# Altium PCB roneMotorBoard-v12_PlayWorks.PcbDoc (part 1 of 2)
Units mil, origin at the board's own origin, x right, y up, seen from the top; angles counter-clockwise.
Board outline 3702 x 3936.38 mil, 2 copper layers (Top Layer, Bottom Layer); 102 components, 86 nets, 373 pads, 235 vias.
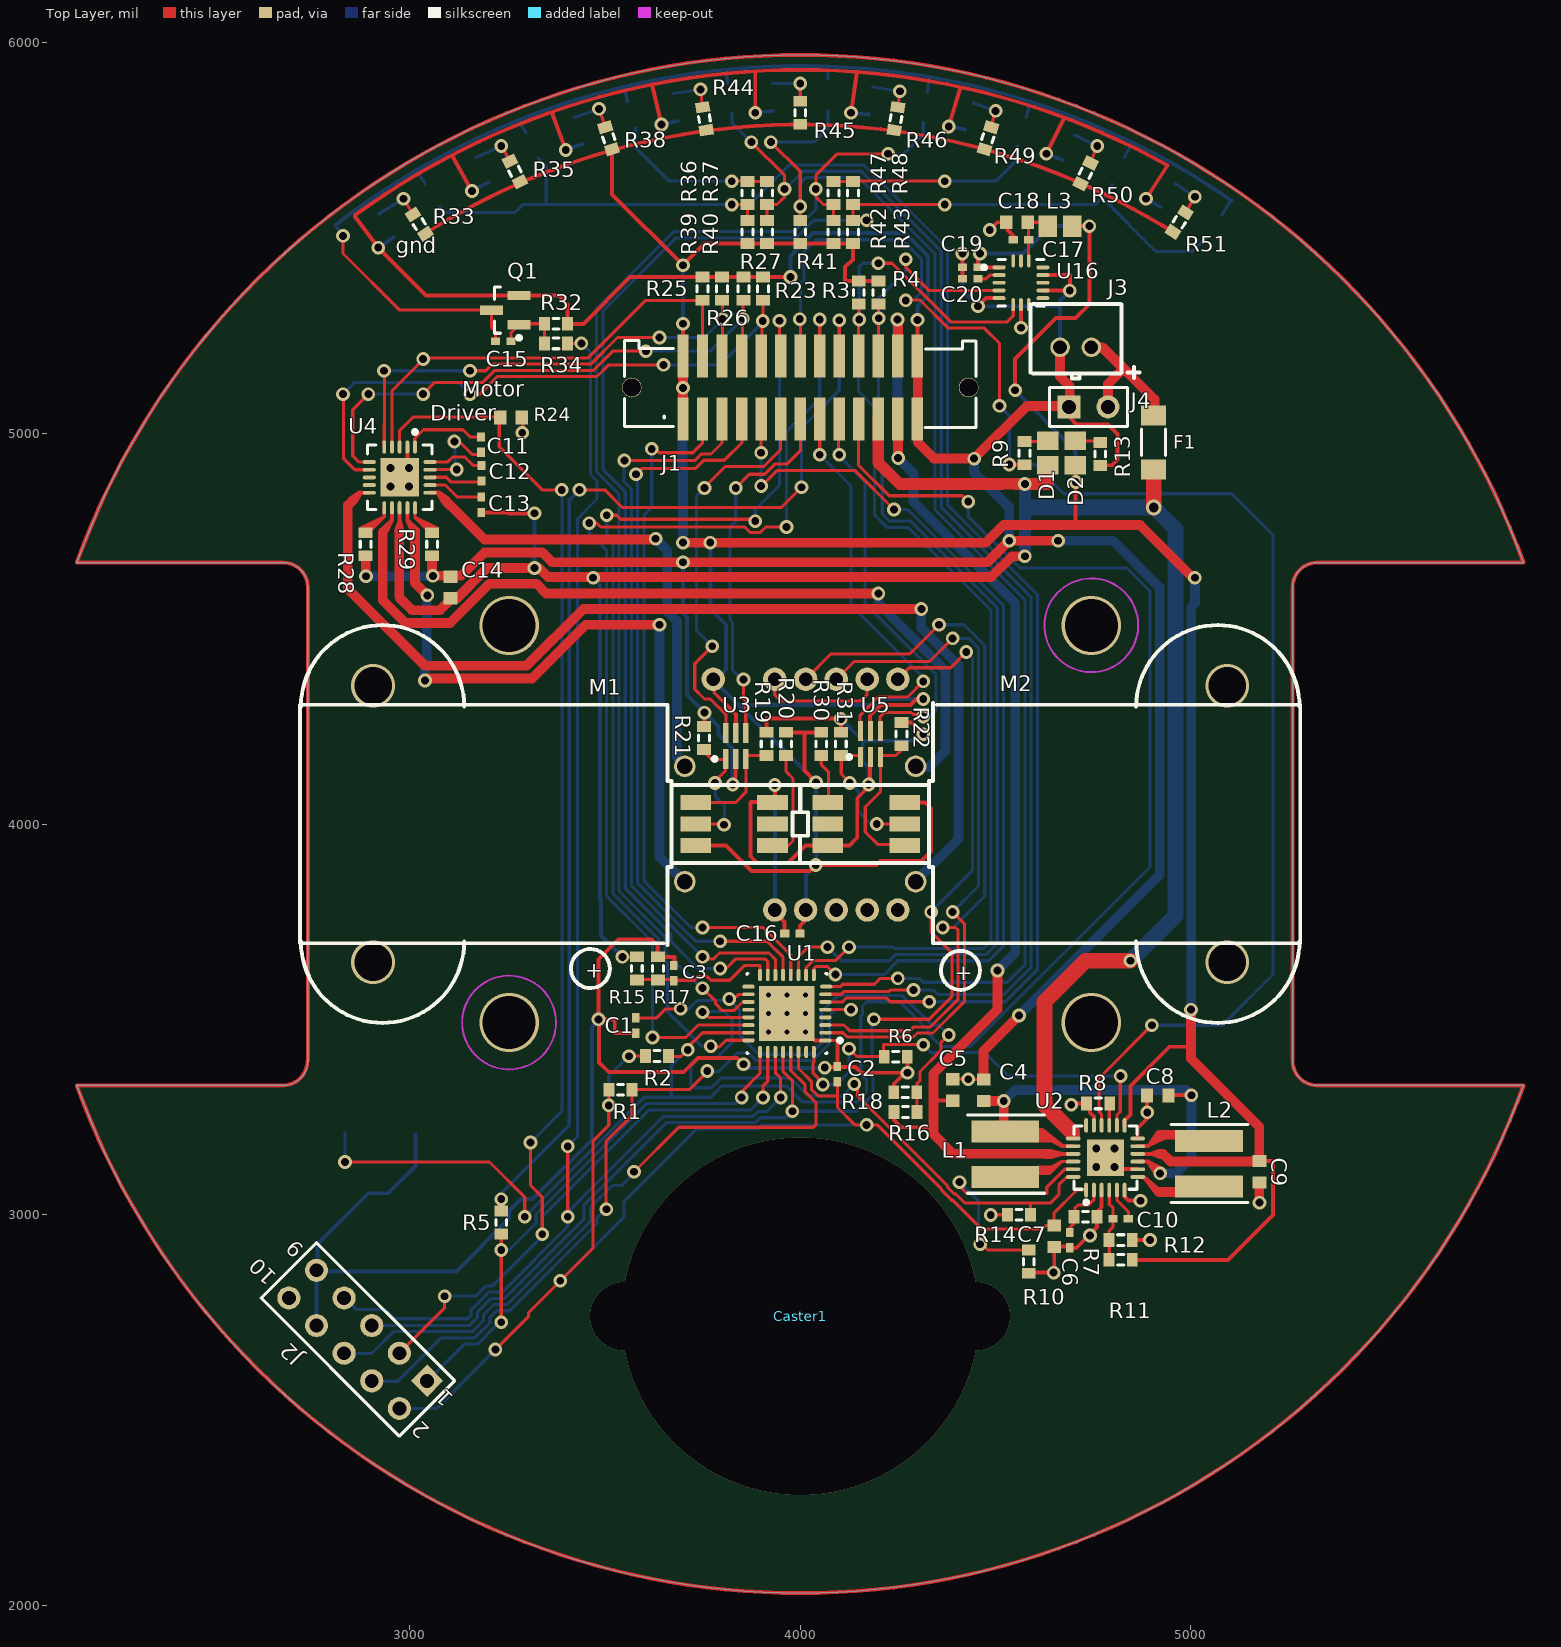
[diagram p0: Top Layer view]
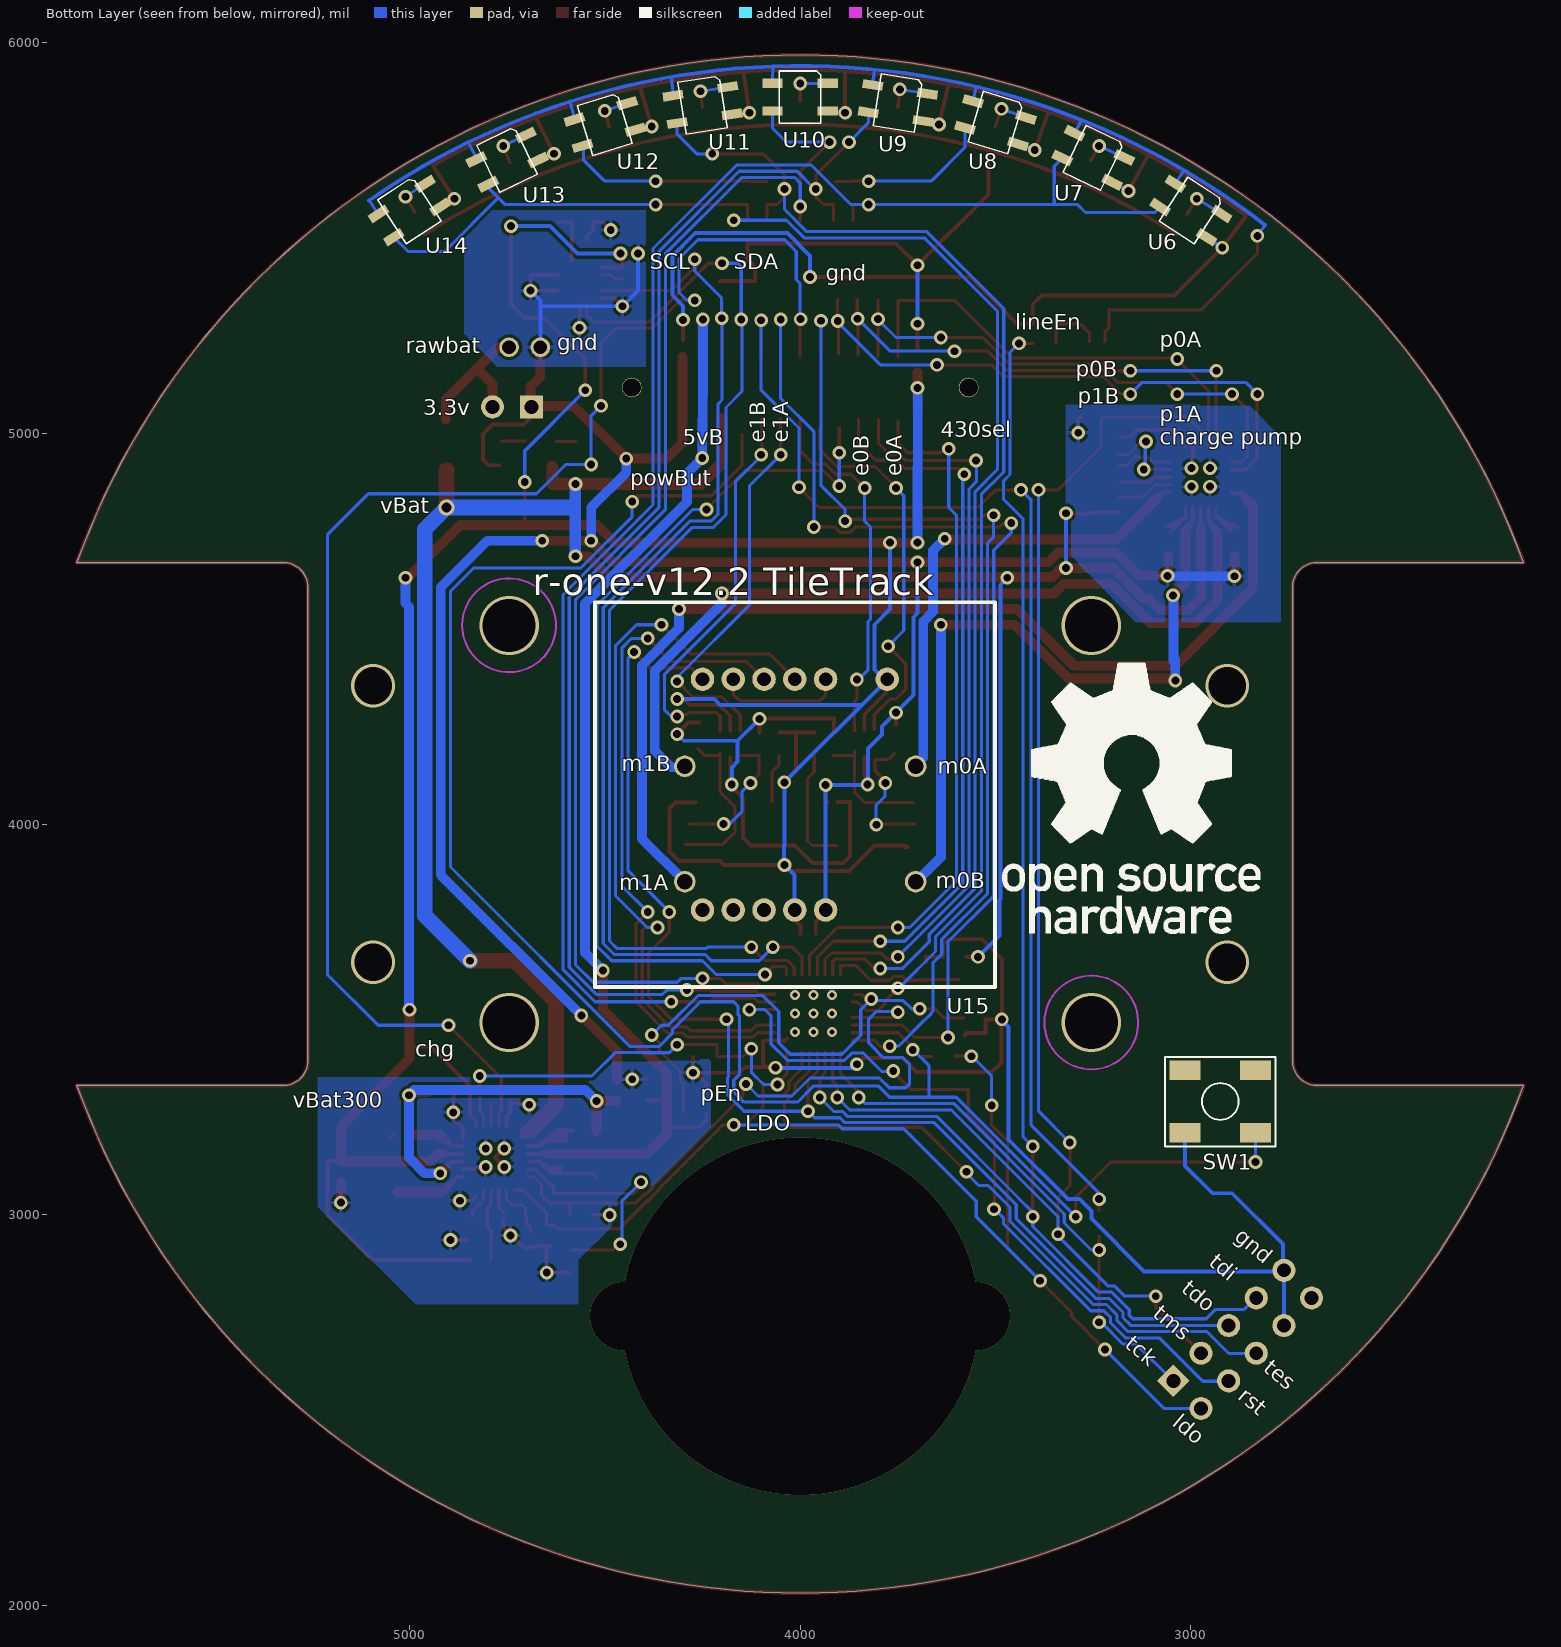
[diagram p1: Bottom Layer view, seen from below]

## Layer stack, top to bottom
Top Layer: signal copper 1.4
Dielectric: dielectric 12.6, FR-4, Dk 4.8
Bottom Layer: signal copper 1.4

## Board outline
2149,3331 2677,3331 ccw(c2677,3394) 2740,3394 2740,4606 ccw(c2677,4606) 2677,4669 2149,4669 cw(c4000,4000) 5851,4669 5323,4669 ccw(c5323,4606) 5260,4606 5260,3394 ccw(c5323,3394) 5323,3331 5851,3331 cw(c4000,4000)

## Design rules (kind name [scope] priority, off if disabled: settings)
Clearance [All] p1: gap=7.9
PolygonConnect [All] p1: connectstyle=Relief reliefconductorwidth=10 reliefentries=4 polygonreliefangle="90 Angle"
RoomDefinition Power [InComponentClass('Power')] p1: confinementstyle=ConfineIn formatcopy=TRUE lockcomponents=FALSE outline 0,0 2000,0 2000,1000 0,1000
RoomDefinition MSP430 [InComponentClass('MSP430')] p2: confinementstyle=ConfineIn formatcopy=TRUE lockcomponents=FALSE outline 0,0 2000,0 2000,1000 0,1000
RoomDefinition motorEncoder [InComponentClass('motorEncoder')] p3: confinementstyle=ConfineIn formatcopy=TRUE lockcomponents=FALSE outline 0,0 2000,0 2000,1000 0,1000
RoomDefinition LineSensors [InComponentClass('LineSensors')] p4: confinementstyle=ConfineIn formatcopy=TRUE lockcomponents=FALSE outline 0,0 2000,0 2000,1000 0,1000
RoutingVias RoutingVias_4 [(IsVia AND InNetClass('All Nets'))] p1: holewidth=20 width=35 viastyle="Through Hole" minholewidth=20 minwidth=35 maxholewidth=20 maxwidth=35
RoutingVias RoutingVias_3 [(IsVia AND InNetClass('All Nets'))] p2: holewidth=20 width=35 viastyle="Through Hole" minholewidth=20 minwidth=35 maxholewidth=20 maxwidth=35
RoutingVias RoutingVias_2 [(IsVia AND InNetClass('All Nets'))] p3: holewidth=20 width=35 viastyle="Through Hole" minholewidth=20 minwidth=35 maxholewidth=20 maxwidth=35
RoutingVias RoutingVias_1 [(IsVia AND InNetClass('All Nets'))] p4: holewidth=20 width=35 viastyle="Through Hole" minholewidth=20 minwidth=35 maxholewidth=20 maxwidth=35
RoutingVias [All] p5: holewidth=20 width=35 viastyle="Through Hole" minholewidth=20 minwidth=35 maxholewidth=20 maxwidth=35
SMDNeckDown [All] p1: percent=50.000
SilkscreenOverComponentPads [All] p1: minsilkscreentomaskgap=10
SolderMaskExpansion [All] p1: expansion=4
Width "Schematic Width Constraint_8" [InNet('3.3V')] p1: maxlimit=100 minlimit=10 preferedwidth=25 minimp=50.000000 maximp=50.000000 favimp=50.000000
Width "Schematic Width Constraint_7" [InNet('VBAT')] p2: maxlimit=50 minlimit=10 preferedwidth=25 minimp=50.000000 maximp=50.000000 favimp=50.000000
Width "Schematic Width Constraint_6" [InNet('VBAT +300')] p3: maxlimit=25 minlimit=10 preferedwidth=25 minimp=50.000000 maximp=50.000000 favimp=50.000000
Width "Schematic Width Constraint_5" [InNet('VBAT_IN')] p4: maxlimit=25 minlimit=10 preferedwidth=25 minimp=50.000000 maximp=50.000000 favimp=50.000000
Width "Schematic Width Constraint_4" [InNet('NetL2_1')] p5: maxlimit=25 minlimit=10 preferedwidth=25 minimp=50.000000 maximp=50.000000 favimp=50.000000
Width "Schematic Width Constraint_3" [InNet('NetL2_2')] p6: maxlimit=25 minlimit=10 preferedwidth=25 minimp=50.000000 maximp=50.000000 favimp=50.000000
Width "Schematic Width Constraint_2" [InNet('5VUSB')] p7: maxlimit=25 minlimit=10 preferedwidth=25 minimp=50.000000 maximp=50.000000 favimp=50.000000
Width "Schematic Width Constraint" [InNet('GND')] p8: maxlimit=25 minlimit=10 preferedwidth=25 minimp=50.000000 maximp=50.000000 favimp=50.000000
Width "Schematic Width Constraint_12" [InNet('MOT_0B')] p9: maxlimit=25 minlimit=10 preferedwidth=20 minimp=50.000000 maximp=50.000000 favimp=50.000000
Width "Schematic Width Constraint_11" [InNet('MOT_0A')] p10: maxlimit=25 minlimit=10 preferedwidth=20 minimp=50.000000 maximp=50.000000 favimp=50.000000
Width "Schematic Width Constraint_10" [InNet('MOT1_B')] p11: maxlimit=25 minlimit=10 preferedwidth=20 minimp=50.000000 maximp=50.000000 favimp=50.000000
Width "Schematic Width Constraint_9" [InNet('MOT1_A')] p12: maxlimit=25 minlimit=10 preferedwidth=20 minimp=50.000000 maximp=50.000000 favimp=50.000000
Width MotorWidth [InNetClass('MotorNets')] p13: maxlimit=25 minlimit=8 preferedwidth=25
Width [All] p14: maxlimit=8 minlimit=8 preferedwidth=8
27 further rules are at their usual default settings.

## Classes and differential pairs
component class GyroAccel: C17 C18 C19 C20 L3 U16
component class Power: C4 C5 C6 C7 C8 C9 C10 D1 D2 F1 J3 J4 L1 L2 R7 R8 R9 R10 R11 R12 R13 R14 R15 R16 R17 R18 U2
component class LineSensors: C15 C16 Q1 R32 R33 R34 R35 R36 R37 R38 R39 R40 R41 R42 R43 R44 R45 R46 R47 R48 R49 R50 R51 U6 U7 U8 U9 U10 U11 U12 U13 U14 U15
component class MSP430: C1 C2 C3 J1 J2 R1 R2 R3 R4 R5 R6 SW1 U1
component class motorEncoder: C11 C12 C13 C14 Caster1 M1 M2 R19 R20 R21 R22 R23 R24 R25 R26 R27 R28 R29 R30 R31 U3 U4 U5

## Components (designator, comment, footprint, x,y, rotation, side; value= is the part's Value field where it differs from the comment)
C1 "Cap Semi" CAPC1005L 3579,3484.5 r90 top
C2 "Cap Semi" CAPC1005L 4095,3360 r270 top
C3 "Cap Semi" CAPC1005L 3676.5,3618.5 r270 top
C4 "Cap" CAPC1608L 4469.5,3318.5 r270 top
C5 "Cap Semi" CAPC1608L 4390.5,3319.5 r270 top
C6 "Cap" CAPC1005L 4690,2935 r90 top
C7 "Cap" CAPC1608L 4650,2945 r270 top
C8 "Cap" CAPC1608L 4915,3305 r180 top
C9 "Cap" CAPC1608L 5175,3110 r90 top
C10 "Cap" CAPC1005L 4820,2990 r0 top
C11 "Cap Semi" CAPC1005L 3183,4971 r90 top
C12 "Cap Semi" CAPC1005L 3184.31,4897.63 r90 top
C13 "Cap Semi" CAPC1005L 3184,4817 r90 top
C14 "Cap Semi" CAPC1608L 3105,4605 r270 top
C15 "Cap" CAPC1005L 3240,5235 r0 top
C16 "Cap Semi" CAPC1005L 3980,3720 r0 top
C17 "Cap Semi" CAPC1005L 4565,5495 r0 top
C18 "Cap Semi" CAPC1608L 4555,5540 r0 top
C19 "Cap Semi" CAPC1005L 4435,5425 r0 top
C20 "Cap Semi" CAPC1005L 4435,5395 r0 top
Caster1 "non connect" "3/4\"CASTER2" 4000,2740 r180 top locked
D1 "Charge" INDC2012L 4634,4949 r90 top
D2 "Power" INDC2012L 4704,4949 r90 top
F1 "PTC" ERJ8G-1206 4904,4976.5 r90 top
J1 "HCOMM/MOT" "HeaderSM 13x2" 4000,5117 r90 top locked
J2 "JTAG" HDR2X5 3045,2575 r135 top locked
J3 "Bat" BatteryConnJST 4705,5220 r180 top
J4 "3.3V conn" HDR1X2 4687.5,5067.5 r0 top
L1 "3.3uH" IndPow 4525,3155 r90 top
L2 "2.2uH" IndPow 5046,3131 r90 top
L3 "Inductor" INDC2012L 4665,5530 r0 top
M1 "motorEncoder_V7b" motorEncoder_V7b 3830,4000 r180 top locked
M2 "motorEncoder_V7b" motorEncoder_V7b 4170,4000 r0 top locked
Q1 "N-Mosfet" SOT-23 3245,5315 r180 top
R1 "Res3" RESC1608L 3540,3320 r180 top
R2 "Res3" RESC1608L 3633.5,3406.5 r180 top
R3 "Res3" RESC1608L 4150,5360 r90 top
R4 "Res3" RESC1608L 4200,5360 r90 top
R5 "Res3" J1-0603 3235,2980 r90 top
R6 "Res3" RESC1608L 4244.5,3404.5 r180 top
R7 "Res3" RESC1608L 4730,2995 r180 top
R8 "Res3" RESC1608L 4762.5,3285 r180 top
R9 "Res3" RESC1608L 4574,4949 r90 top
R10 "Res3" RESC1608L 4585,2880 r90 top
R11 "Res3" RESC1608L 4820,2885 r180 top
R12 "Res3" RESC1608L 4820,2935 r0 top
R13 "Res3" RESC1608L 4768,4947 r90 top
R14 "Res3" RESC1608L 4560,3000 r0 top
R15 "Res3" RESC1608L 3582,3630.5 r90 top
R16 "Res3" RESC1608L 4269.5,3263 r180 top
R17 "Res3" RESC1608L 3636,3630.5 r270 top
R18 "Res3" RESC1608L 4269,3313.5 r0 top
R19 "" RESC1608L 3914,4205 r90 top
R20 "" RESC1608L 3964,4205 r90 top
R21 "" RESC1608L 3754,4220 r270 top
R22 "" RESC1608L 4259,4230 r270 top
R23 "Res3" RESC1608L 3905,5370 r90 top
R24 "Res3" CAPC1608L 3260,5040 r0 top
R25 "Res3" RESC1608L 3750,5370 r90 top
R26 "Res3" RESC1608L 3800,5370 r90 top
R27 "Res3" RESC1608L 3855,5370 r90 top
R28 "Res3" RESC1608L 2888,4716 r270 top
R29 "Res3" RESC1608L 3058,4716 r270 top
R30 "" RESC1608L 4054,4205 r90 top
R31 "" RESC1608L 4104,4205 r270 top
R32 "Res3" J1-0603 3375,5280 r180 top
R33 "Res3" J1-0603 3025,5535 r303 top
R34 "Res3" J1-0603 3375,5230 r0 top
R35 "Res3" J1-0603 3270,5670 r296 top
R36 "Res3" J1-0603 3865,5615 r90 top
R37 "Res3" J1-0603 3915,5615 r90 top
R38 "Res3" J1-0603 3510,5755 r287 top
R39 "Res3" J1-0603 3865,5515 r270 top
R40 "Res3" J1-0603 3915,5515 r270 top
R41 "Res3" J1-0603 4000,5515 r270 top
R42 "Res3" J1-0603 4085,5515 r270 top
R43 "Res3" J1-0603 4135,5515 r270 top
R44 "Res3" J1-0603 3755,5805 r279 top
R45 "Res3" J1-0603 4000,5820 r270 top
R46 "Res3" J1-0603 4245,5805 r261 top
R47 "Res3" J1-0603 4085,5615 r90 top
R48 "Res3" J1-0603 4135,5615 r90 top
R49 "Res3" J1-0603 4480,5755 r253 top
R50 "Res3" J1-0603 4730,5665 r244 top
R51 "Res3" J1-0603 4970,5540 r237 top
SW1 "power button" SwitchTall-TL330 2925,3290 r0 bottom
U1 "MSP430" MSP430_32PIN 3966,3515 r180 top locked
U2 "LTC3566" QFN-24 4781,3146 r90 top
U3 "schmit trigger" DCK(R-PDSO-C6) 3835,4200 r90 top
U4 "MOTOR-A3906" QFN-20 2975,4887 r270 top locked
U5 "schmit trigger" DCK(R-PDSO-C6) 4180,4205 r90 top
U6 "OptoReflector" QRE1113 3000,5570 r33 bottom locked
U7 "OptoReflector" QRE1113 3250,5705 r26 bottom locked
U8 "OptoReflector" QRE1113 3500,5795 r17 bottom locked
U9 "OptoReflector" QRE1113 3750,5845 r9 bottom locked
U10 "OptoReflector" QRE1113 4000,5860 r0 bottom locked
U11 "OptoReflector" QRE1113 4250,5840 r351 bottom locked
U12 "OptoReflector" QRE1113 4500,5790 r343 bottom locked
U13 "OptoReflector" QRE1113 4750,5700 r334 bottom locked
U14 "OptoReflector" QRE1113 5000,5570 r327 bottom locked
U15 "ID-12LA" ID12-LA 4250,3780 r180 bottom locked
U16 "MMA8452Q" MMA8452Q 4565,5385 r0 top

## Footprints (in the part's own frame and the unit in brackets; to place one, negate y for a bottom-side part, rotate by r counter-clockwise, add the part's x,y. Pads: shape width x height; smd on the part's side, far side on the other; paste and mask are expansions set on the pad)
"3/4\"CASTER2" [mil] "3/4\" caster for board"
BatteryConnJST [mil] "Connector for Battery"
  round 50 hole 35: 1(-40,0) 2(40,0)
  silkscreen extent -163,-110 116,80
CAPC1005L [mm] "Chip Capacitor, Body 1.0x0.5mm, IPC High Density"
  rect 0.6x0.5 smd: 1(-0.5,0) 2(0.5,0)
  body extent -0.55,-0.3 0.55,0.3, height 1.3
CAPC1608L [mm] "Chip Capacitor, Body 1.6x0.8mm, IPC High Density"
  rect 0.8x0.9 smd: 1(-0.7,0) 2(0.7,0)
  body extent -0.87,-0.48 0.87,0.48, height 1.3
DCK(R-PDSO-C6) [mm] "TSOP, 6-Leads, Body 2.2x1.4mm (max), Pitch 0.65mm, IPC Medium Density"
  rect 1.3x0.35 smd: 1(-0.85,0.65) 2(-0.85,0) 3(-0.85,-0.65) 4(0.85,-0.65) 5(0.85,0) 6(0.85,0.65)
  silkscreen extent -0.97,1.25 -0.73,1.5, body extent -0.7,-1.07 0.7,1.08, height 1.1
ERJ8G-1206 [mm] "Chip Resistor, Body 3.2x1.6mm, IPC High Density"
  rect 1.3x1.6 smd: 1(-1.75,0) 2(1.75,0)
  silkscreen extent -0.86,-0.79 0.86,0.79, body extent -1.6,-0.79 1.6,0.79, height 0.9
HDR1X2 [mm] "Connector; Header; 2 Position"
  rect 1.5x1.5 hole 0.9: 1(0,0)
  round 1.5 hole 0.9: 2(2.54,0)
  silkscreen extent -1.27,-1.27 3.81,1.27
HDR2X5 [mm] "Connector; Header; 5x2 Position"
  rect 1.5x1.5 hole 0.9: 1(0,0)
  round 1.5 hole 0.9: 2(0,2.54) 3(2.54,0) 4(2.54,2.54) 5(5.08,0) 6(5.08,2.54) 7(7.62,0) 8(7.62,2.54) 9(10.16,0) 10(10.16,2.54)
  silkscreen extent -1.27,-1.27 11.43,3.81
"HeaderSM 13x2" [mm]
  rect 2.795x0.74 smd: 1(-2.032,7.62) 2(2.033,7.62) 3(-2.032,6.35) 4(2.033,6.35) 5(-2.032,5.08) 6(2.033,5.08) 7(-2.032,3.81) 8(2.033,3.81) 9(-2.032,2.54) 10(2.033,2.54) 11(-2.032,1.27) 12(2.033,1.27) 13(-2.032,0) 14(2.033,0) 15(-2.032,-1.27) 16(2.033,-1.27) 17(-2.032,-2.54) 18(2.033,-2.54) 19(-2.032,-3.81) 20(2.033,-3.81) 21(-2.032,-5.08) 22(2.033,-5.08) 23(-2.032,-6.35) 24(2.033,-6.35) 25(-2.032,-7.62) 26(2.033,-7.62)
  round 1.27 hole 1.19: c1(0,10.947) c2(0,-10.947)
  silkscreen extent -2.59,-11.43 3.06,11.43
ID12-LA [mil]
  round 60 hole 35: 1(314.96,0) 2(236.22,0) 3(157.48,0) 4(78.74,0) 5(0,0) 6(0,590.55) 7(78.74,590.55) 8(157.48,590.55) 9(236.22,590.55) 10(314.96,590.55) 11(472.44,590.55)
  silkscreen extent -276,-197 748,787
INDC2012L [mm] "Chip Inductor, Body 2.0x1.2mm, IPC High Density"
  rect 1.2x1.4 smd: 1(-0.8,0) 2(0.8,0)
  body extent -1.1,-0.7 1.1,0.7, height 0.55
IndPow [mil]
  rect 56.5x173 smd: 1(-58.25,0) 2(58.25,0)
  silkscreen extent -100,-100 100,97
J1-0603 [mm] "Chip Resistor, Body 1.6x0.8mm, IPC High Density"
  rect 0.7x0.9 smd: 1(-0.75,0) 2(0.75,0)
  silkscreen extent -0.2,-0.35 0.2,0.35, body extent -0.85,-0.48 0.85,0.48, height 0.9
MMA8452Q [mm] "accelerometer-v9"
  oval 0.85x0.25 smd: 1(-1.425,1) 2(-1.425,0.5) 3(-1.425,0) 4(-1.425,-0.5) 5(-1.425,-1) 9(1.425,-1) 10(1.425,-0.5) 11(1.425,0) 12(1.425,0.5) 13(1.425,1)
  oval 0.25x0.85 smd: 6(-0.5,-1.425) 7(0,-1.425) 8(0.5,-1.425) 14(0.5,1.425) 15(0,1.425) 16(-0.5,1.425)
  silkscreen extent -2.52,-1.52 1.5,1.53, body extent -1.5,-1.5 1.5,1.5, height 1
motorEncoder_V7b [mm] "Precision Wire Wound Inductor, 2-Leads, Body 2.5x2.3mm, IPC Medium Density"
  rect 2x1 smd: A(-2.524,1.4) C(2.476,1.4) E1(2.476,0) E2(2.476,-1.4) K(-2.524,-1.4) NC(-2.524,0)
  round 1.4 hole 1: M1(3.185,3.75) M2(3.185,-3.75)
  Mechanical 1 keep-out region: 4.496,-7.849 28.118,-7.849 28.118,7.645 4.496,7.645
  silkscreen extent -4.83,-12.93 28.18,12.93
MSP430_32PIN [mm] "32 pin QFN"
  oval 0.8x0.25 smd: 1(-2.5,1.75) 2(-2.5,1.25) 3(-2.5,0.75) 4(-2.5,0.25) 5(-2.5,-0.25) 6(-2.5,-0.75) 7(-2.5,-1.25) 8(-2.553,-1.75) 17(2.5,-1.75) 18(2.5,-1.25) 19(2.5,-0.75) 20(2.5,-0.25) 21(2.5,0.25) 22(2.5,0.75) 23(2.5,1.25) 24(2.5,1.75)
  oval 0.25x0.8 smd: 9(-1.75,-2.5) 10(-1.25,-2.5) 11(-0.75,-2.5) 12(-0.25,-2.5) 13(0.25,-2.5) 14(0.75,-2.5) 15(1.25,-2.5) 16(1.75,-2.5) 25(1.75,2.5) 26(1.25,2.5) 27(0.75,2.5) 28(0.25,2.5) 29(-0.25,2.5) 30(-0.75,2.5) 31(-1.25,2.5) 32(-1.75,2.5)
  rect 3.6x3.6 smd: 33(0,0)
  silkscreen extent -3.58,-2.6 2.6,2.6, body extent -2.58,-2.57 2.57,2.58, height 1
QFN-20 [mm] "QFN, 20-Leads, Body 4.2x4.2mm (max), Pitch 0.50mm, IPC Medium Density"
  oval 0.85x0.25 smd: 1(-1.975,1) 2(-1.975,0.5) 3(-1.975,0) 4(-1.975,-0.5) 5(-1.975,-1) 11(1.975,-1) 12(1.975,-0.5) 13(1.975,0) 14(1.975,0.5) 15(1.975,1)
  oval 0.25x0.85 smd: 6(-1,-1.975) 7(-0.5,-1.975) 8(0,-1.975) 9(0.5,-1.975) 10(1,-1.975) 16(1,1.975) 17(0.5,1.975) 18(0,1.975) 19(-0.5,1.975) 20(-1,1.975)
  rect 2.5x2.5 smd: 21(0,0)
  silkscreen extent -3.07,-2.1 2.1,2.1, body extent -2.07,-2.07 2.07,2.07, height 0.8
QFN-24 [mm] "QFN, 24-Leads, Body 4.1x4.1mm (max), Pitch 0.50mm, IPC Medium Density"
  oval 0.95x0.25 smd: 1(-2.1,1.25) 2(-2.1,0.75) 3(-2.1,0.25) 4(-2.1,-0.25) 5(-2.1,-0.75) 6(-2.1,-1.25) 13(2.1,-1.25) 14(2.1,-0.75) 15(2.1,-0.25) 16(2.1,0.25) 17(2.1,0.75) 18(2.1,1.25)
  oval 0.25x0.95 smd: 7(-1.25,-2.1) 8(-0.75,-2.1) 9(-0.25,-2.1) 10(0.25,-2.1) 11(0.75,-2.1) 12(1.25,-2.1) 19(1.25,2.1) 20(0.75,2.1) 21(0.25,2.1) 22(-0.25,2.1) 23(-0.75,2.1) 24(-1.25,2.1)
  rect 2.4x2.4 smd: 25(0,0)
  silkscreen extent -3.02,-2.05 2.05,2.05, body extent -2.05,-2.05 2.05,2.05, height 0.8
QRE1113 [mil] "Reflective Opto Sensor with Analog Output"
  rect 52x24 smd: 1(-70.87,-35.43) 2(70.87,-35.43) 3(70.87,35.43) 4(-70.87,35.43)
  silkscreen extent -53,-67 53,67, body extent -57,-72 57,71, height 67
RESC1608L [mm] "Chip Resistor, Body 1.6x0.8mm, IPC High Density"
  rect 0.7x0.9 smd: 1(-0.75,0) 2(0.75,0)
  silkscreen extent -0.2,-0.35 0.2,0.35, body extent -0.85,-0.48 0.85,0.48, height 0.9
SOT-23 [mm] "SOT23, 3-Leads, Body 3.0x2.5mm (max), Pitch 0.95mm, IPC Medium Density"
  rect 1.5x0.6 smd: 1(-0.9,0.95) 2(-0.9,-0.95) 3(0.9,0)
  silkscreen extent -1.03,-1.5 0.7,1.92, body extent -0.7,-1.5 0.7,1.5, height 1.2
SwitchTall-TL330 [mil] "Small SMDTall Tact Switch E-Switch TL330"
  rect 80x50 smd: 1(-90,80) 2(90,80) 3(-90,-80) 4(90,-80)
  silkscreen extent -141,-114 141,115

## Part data
C1 C2 C3 C5 C11 C12 C13 C14 C16 C17 C18 C19 C20: "Capacitor (Semiconductor SIM Model)"
C4 C6 C7 C8 C9 C10 C15: "Capacitor"
Caster1: library part "Caster 3/4in", "This is just a space saver to get the caster onto the pcb"
D1 D2: library part LED2, "Typical RED, GREEN, YELLOW, AMBER GaAs LED"
F1: library part PTC_FUSE, "Fuse"
J1: library part HCOMM/HMOT, "Header, 2X20, 50mil, IDC"
J2: library part "Header 5X2", "Header, 5-Pin, Dual row"
J3: library part BatteryConnJST
J4: library part "Header 2", "Header, 2-Pin"
L1 L2: library part Inductor
R1 R2 R3 R4 R5 R6 R7 R8 R9 R10 R11 R12 R13 R14 R15 R16 R17 R18 R23 R24 R25 R26 R27 R28 R29 R32 R33 R34 R35 R36 R37 R38 R39 R40 R41 R42 R43 R44 R45 R46 R47 R48 R49 R50 R51: "Resistor"
R19 R20 R21 R22 R30 R31: library part Res3, "Resistor"
SW1: library part Switch-TL330
U1: library part MSP430_32pin
U6 U7 U8 U9 U10 U11 U12 U13 U14: library part QRE1113GR

## Via types
v1: diameter 35, hole 20, Top Layer to Bottom Layer, 109 vias
v2: diameter 35, hole 20, Top Layer to Bottom Layer, tented bottom, 97 vias
v3: diameter 25.98, hole 12.99, Top Layer to Bottom Layer, tented both sides, 9 vias
v4: diameter 35, hole 20, Top Layer to Bottom Layer, tented both sides, 8 vias
v5: diameter 112, hole 96, Top Layer to Bottom Layer, tented bottom, 4 vias
v6: diameter 152, hole 136, Top Layer to Bottom Layer, tented bottom, 4 vias
v7: diameter 175, hole 175, Top Layer to Bottom Layer, tented bottom, 2 vias
v8: diameter 915, hole 915, Top Layer to Bottom Layer, tented bottom, 1 vias
v9: diameter 40, hole 25, Top Layer to Bottom Layer, tented bottom, 1 vias

## Nets (pads, with @x,y where several pads share a name; then routed paths per layer and width w, separated by ;. In a path a pad name is that pad's centre, name@x,y a point inside that pad or via, vN(x,y) a via of type N, cw(c..) or ccw(c..) an arc to the next point about the centre after c; other vN are vias at no path point)
3.3LDO: C2.2 C7.1 J2.2 R1.2 R2.2 U1.30 U2.1 | length 3297.4
  Top Layer w8: v2@3223.75,2658.75 3305,2740 3305,2750 3470,2915 3470,3189 3510,3229 v2(3510,3280) ; v2@3510.47,3280.47 R1.2@3510.47,3320 ; v2@3569,3406 R2.2@3604.5,3406 ; U1.30@3995.53,3416.57 3995.53,3374.47 4028.6,3341.4 4028.6,3321.32 4045.82,3304.1 4092.9,3304.1 4093.5,3303.5 ; 4095.5,3315.5 4095.5,3274.5 4140,3230 4197.5,3230 4361.2,3066.3 ; 4095.5,3316 C2.2@4095.5,3339 ; 4361.2,3063.74 4387.74,3037.2 ; 4390.3,3037.2 4463.5,2964 4620,2964 4629,2973 4649,2973 4649,3004 4708.48,3063.48 U2.1@4731.79,3063.48
  Bottom Layer w8: J2.2@2977.5,2504.5 3069.5,2504.5 3209.5,2644.5 v2@3209.5,2660 ; v2@3397.25,2835.75 3397.25,2842.25 3549.5,2994.5 3549.5,3034.5 3735,3220 3892.46,3220 3902.46,3230 v2(4170,3230) ; v2(3510,3280) 3510,3355 3560.5,3405.5 v2(3562,3405.5)
  other v2: 3220,2655 3386,2831
3.3V: C9.2 C16.2 C19.2 D2.1 J1.1 J1.2 L3.2 M1.C M2.C R3.2 R4.2 R11.1 R20.2 R30.2 R33.2 R35.2 R38.2 R39.2 R40.2 R41.2 R42.2 R43.2 R44.2 R45.2 R46.2 R49.2 R50.2 R51.2 U2.10 U2.13 U3.5 U5.5 U15.2 U15.11 U16.1 | length 12376.2
  Top Layer w10: R33.2@3038.34,5509.74 cw(c4000,4000) R38.2@3518.63,5724.06 ; R38.2@3518.63,5723.63 3518.63,5611.37 v1(3700,5430) 3755.47,5485.47 R39.2@3865,5485.47 ; R38.2@3518.63,5726.76 R38.2@3518.63,5724.06 ; J1.2@3700,5215 v1(3700,5280) ; M1.C@3723.62,3940.88 M1.C@3732.56,3940.88 ; M1.C@3732.52,3944.88 3810.12,3944.88 3875,3880 4025,3880 v1(4040,3895) 4195,3895 4205,3905 4310,3905 4335,3930 4335,4040 4319.88,4055.12 M2.C@4267.48,4055.12 ; U15.11@3780,4365 3780,4335.87 3836,4279.87 U3.5@3836,4241.46 ; R39.2@3865.47,5485.47 R40.2@3915,5485.47 R41.2@4000,5485.47 R42.2@4085,5485.47 R43.2@4135,5485.47 ; R20.2@3964,4234.53 4010.5,4234.53 ; C16.2@3999.69,3720 3999.69,3739.69 4010,3750 U15.2@4010,3780 ; v2(4040.5,4106.5) 4010.5,4136.5 4010.5,4234.53 ; R30.2@4052.53,4234.53 4010.5,4234.53 ; R43.2@4135,5485 4135,5445 4115,5425 4115,5390 R4.2@4205,5390 ; U5.5@4179,4238.46 4179,4277.1 4206.9,4305 4282.32,4305 4297.32,4320 4301.2,4320 v1@4313.1,4308.1 ; C19.2@4454.69,5425 4454.69,5454.69 v1(4460,5460) ; C19.2@4455,5424.37 U16.1@4508.9,5424.37 ; v1(4550,5110) 4550,5190 4655,5295 4705,5295 4740,5330 v1(4740,5530) L3.2@4700,5530 ; 4705,4770 v2(4705,4875) ; 4705,4855 D2.1@4705,4902 ; 4740,5630 4740,5629.88 ; U2.13@4830.21,3228.68 4830.21,3241.71 4845,3256.5 4845,3330 4945,3430 5000,3430 ; R11.1@4846.5,2884 5095,2884 5210,2999 5210,3135.33 ; U2.10@4863.68,3156 4921,3156 ; R51.2@4961.96,5509.54 ccw(c4000,4000) 4740,5629.88 ; C9.2@5175,3137.56 5207.77,3137.56 ; R38.2@3518.63,5724.06 cw(c4000,4000) 4740,5629.88
  Top Layer w25: v2(3700,4720) v2(3770,4720) 4475,4720 4520,4765 4870,4765 v1@5000,4635 ; J1.1@3700,5055 v2(3700,5116) J1.2@3700,5156 ; 4921,3156 4928.28,3156 4948.28,3136 C9.2@5175,3136 ; v1(5000,3525) 5000,3430 5000,3400 5174.5,3225.5 C9.2@5174.5,3138.06
  Bottom Layer w10: v1(3700,5280) v1@3700,5425 ; v2(3770,4720) 3770,4550 3810,4510 3810,4395 U15.11@3775,4360 ; U15.11@3787,4360 4040,4107 4040,3946 ; 3845,4305 4205,4305 4220,4320 v1(4315,4320) ; U15.2@4015,3780 4015,3870 v1(4040,3895) 4041,3896 4041,3945 ; v1(4460,5460) 4570,5460 4640,5530 v1(4740,5530) ; v1(4550,5110) 4705,4955 v2(4705,4875) v2@4705,4861.9
  Bottom Layer w25: v2@3699,5115 v2(3700,4720) ; v1(5000,3525) 5000.8,3525.8 5000.8,4555.8 5010,4565 v1(5010,4630)
5VUSB: C5.2 J1.23 J1.24 R16.2 U2.21 | length 3046.2
  Top Layer w10: R16.2@4240,3257.5 4240,3242.5 4258.5,3224 4341,3224 ; 4344,3292 C5.2@4392.69,3292 ; 4641,3156 U2.21@4698.32,3156
  Top Layer w25: J1.24@4250,5184 J1.24@4250,5197.02 v2@4250,5289 ; v2(4250.5,4936.5) J1.23@4250.5,5032.5 ; v1(4505,3625) 4505,3525 4341,3361 4341,3224 4341,3206.5 4391.5,3156 4641,3156
  Bottom Layer w25: v2@4249,5290 4249,5146 v2(4250.5,4936.5) 4290,4897 4290,4824.51 4550.6,4563.91 4550.6,3670.6 v1(4505,3625)
  other v2: 4249,5291
5VUSB_SENSE: C1.2 R16.1 R18.2 U1.18 | length 1328.5
  Top Layer w8: C1.2@3581,3504 3632.5,3504 3655.5,3527 v2(3694,3527) ; v2(3818.26,3552) 3830,3552 3841.5,3563.5 U1.18@3859,3563.5 ; R18.2@4298.53,3313.5 4298.53,3335.03 4306.5,3343 4306.5,3366.5 4360,3420 4360,3440 v2(4380,3460) ; R16.1@4299.03,3263 R18.2@4299.03,3309.97
  Bottom Layer w8: v2(3694,3527) 3715,3527 3735.9,3547.9 3811.4,3547.9 v2@3811.5,3548 ; v2@3820,3550 3845,3525 3845,3459.06 3893.16,3410.9 4025.9,3410.9 4055,3440 4055,3520 4095.9,3560.9 4261.59,3560.9 4337.49,3485 4355,3485 v2(4380,3460)
CHARGE_LIMIT_LIM1: R6.2 U1.32 U2.14 | length 1124.3
  Top Layer w8: U1.32@4034.9,3416.57 4034.9,3390.4 4033.1,3388.6 4033.1,3361.9 4055.5,3339.5 v2@4058,3339.5 ; v2(4125,3425) 4145,3405 4213,3405 R6.2@4213,3406.47 ; R6.2@4213,3410 4213,3435.5 v2@4313,3435.5 ; U2.14@4810.53,3228.68 4810.53,3255.38 ; 4810.74,3255.38 4819,3263.65 v2@4819,3356
  Bottom Layer w8: v2(4058,3333.5) 4094,3333.5 4125,3364.5 v2(4125,3425) ; v2(4315,3435) 4314.5,3435 4314,3434.5 4315.5,3434.5 4335.3,3414.7 4398.76,3414.7 4399.06,3415 4473,3415 4533,3355 v2(4820,3355)
CHRG: J1.14 R9.1 U2.16 | length 3930.6
  Top Layer w8: J1.14@4001,5198.02 v2@4001,5291 ; v1@4270,5341 4306.51,5341 4378.41,5269.1 4470.9,5269.1 4510,5230 v1(4510,5070) ; v2@4532.53,4919.47 R9.1@4564,4919.47 ; U2.16@4771.16,3228.68 4771.16,3257.34 4765,3263.5 4765,3350 v1(4900,3485)
  Bottom Layer w8: v2@4001,5294 4001,5384.42 4010,5393.42 4010,5465 4040,5495 4261.58,5495 4310,5446.58 4310,5360 4291,5341 v1@4270,5341 ; v1(4510,5070) 4535,5045 v2(4535,4920) 4600,4920 4675,4845 5105,4845 5210,4740 5210,3615 5080,3485 v1(4900,3485) v1@4895,3485
  other v1: 4270,5340
  other v2: 3999,5292
FTDI_RESET: J1.12 U1.24 | length 2595.1
  Top Layer w8: v1(3505,4790) 3530,4790 3540,4780 3880,4780 v1(3885,4775) ; v2@3774.5,3430 3793.5,3430 3810,3446.5 U1.24@3867.18,3446.5 ; J1.12@3947,5199 v2(3947,5288)
  Bottom Layer w8: v1(3505,4790) 3505,4735 3520.5,4719.5 3520.5,3822.07 3637.9,3704.67 3637.9,3667.13 3660,3645.03 3660,3520 3664.6,3515.4 3664.6,3514.82 3681.82,3497.6 3682.4,3497.6 3748.5,3431.5 v2@3770.5,3431.5 ; v1(3885,4775) 3885,4805 3947,4867 v2(3947,5288)
  other v2: 3771,3431.5
GND: C1.1 C2.1 C3.1 C4.1 C5.1 C6.1 C7.2 C8.2 C9.1 C14.1 C16.1 C17.1 C18.1 C19.1 C20.1 J1.25 J1.26 J2.8 J2.9 J3.2 J4.1 M1.K M2.K Q1.2 R6.1 R7.1 R8.2 R10.1 R12.2 R13.1 R14.1 R17.1 R18.1 R19.2 R21.1 R22.1 R23.2 R24.2 R25.2 R26.2 R27.2 R28.2 R29.2 R31.1 R32.1 SW1.2 U1.1 U1.33 U2.3 U2.6 U2.8 U2.12 U2.17 U2.25 U3.2 U4.2 U4.21 U5.2 U6.4 U7.4 U8.4 U9.4 U10.4 U11.4 U12.4 U13.4 U14.4 U15.1 U16.5 U16.7 U16.10 U16.12 | length 18609.6
  Top Layer w8: U1.1@4067.94,3446 4095,3446 ; C5.1@4390,3347.56 v2@4427.5,3347.56 ; v2@4429.94,3346.06 C4.1@4469,3346.06
  Top Layer w10: 2860,5555 v1(2920,5475) ; 2860.21,5557.49 cw(c4000,4000) 3620.63,5892.35 ; v1@2921.84,5472.48 cw(c4000,4000) 2922.23,5472.77 3042.6,5352.4 Q1.2@3280.43,5352.4 3382.6,5352.4 3405,5330 3405,5280 3445,5280 3564.53,5399.53 R25.2@3750,5399.53 ; U4.21@2995,4907 U4.2@2995,4965.07 ; 3110,5710 v1(3160,5620) ; R24.2@3282.56,5042 3290,5034.56 3290,5002.5 v2(3288.5,5001) ; 3365,5820 v1(3400,5725) ; v2(3484,3500) 3484,3654 3535,3705 3620,3705 3635,3690 R17.1@3635,3660 ; v2@3485,3500 3485,3390 3510,3365 3702,3365 3738,3401 3839,3401 v2(3855,3385) ; v2@3485.5,3500 3525.47,3500 3525.47,3465.5 3572.82,3465.5 C1.1@3579.5,3458.82 ; v1(3645,5790) 3620.63,5892.35 ; R17.1@3645.5,3661.5 3647,3660 3678,3660 C3.1@3678,3647.18 ; R25.2@3751,5399.53 R26.2@3800,5399.53 R27.2@3855,5399.53 R23.2@3905,5399.53 v2@3980,5399.53 ; R21.1@3755,4254 v2(3755,4285) ; v2@3830,4102.5 3835,4126 U3.2@3835,4166.54 U3.2@3835,4171.54 ; 3872.5,4055 3872.5,3917.5 3890,3900 3969,3900 4014,3945 M2.K@4096,3945 ; 3873.5,4056 M1.K@3904.12,4056 ; v1(3885,5820) 3885,5925 ; R19.2@3914,4235 3914,4270 v1@4096,4270 ; M1.K@3929.37,4055.12 3930.12,4055.12 3935,4060 v1(3935,4100) ; U15.1@3932.52,3777.48 3960.32,3749.68 C16.1@3960.32,3720 ; U1.33@4033.12,3450.88 4037.9,3446.1 U1.1@4064.43,3446.1 ; v2@4058,3378 C2.1@4095,3378 ; M2.K@4094.84,3944.88 4125.88,3944.88 4146,3965 4146,4066 v2@4176.5,4096.5 ; C2.1@4095,3379.68 4095,3444.5 ; C2.1@4096.69,3378 4141,3378 4155.5,3363.5 v2@4262.2,3363.5 ; R31.1@4104,4234.53 v1@4104,4262 ; v1(4130,5820) 4144.94,5924.55 ; 4145,5925 4144.94,5924.55 ; v2@4179,4101 U5.2@4179,4171.54 ; R18.1@4239.47,3313.5 4239.47,3334.97 4274.5,3370 R6.1@4274.5,3404 ; R22.1@4259,4259.53 4285.47,4259.53 v2(4315,4230) ; J1.26@4300,5239 v2(4300,5290) ; v1(4380,5785) 4410,5885 ; C19.1@4415,5425 v1(4415,5460) ; C20.1@4415.31,5395 C19.1@4415.31,5424.69 ; v1(4455,5325) 4475.63,5345.63 U16.5@4508.9,5345.63 ; v1@4477.5,5512.5 v1(4485,5520) 4505,5540 C18.1@4527.44,5540 ; v2@4496.5,3000 R14.1@4530.47,3000 ; C18.1@4530,5540 4530,5520 4545.31,5504.69 C17.1@4545.31,5495 ; v1(4565,5270) U16.7@4565,5328.9 ; R10.1@4592,2852 v2(4648.5,2852) ; U16.10@4621.1,5365.31 v1@4690,5365.31 ; U16.12@4621.1,5404.69 4690,5404.69 v1@4690,5365.31 ; v1(4630,5715) 4675,5805 ; C7.2@4640,2918.44 C6.1@4690,2918.44 ; v2@4650,2853.5 C7.2@4650,2917.44 ; C6.1@4690,2915.32 4706.31,2915.32 4760,2969 R7.1@4760,2988 ; J4.1@4690,5060 4690,5040 4707.5,5022.5 4787,5022.5 ; v1(4690,5365) v1@4690,5365.31 ; v2@4696,3284.5 R8.2@4740.47,3284.5 ; R8.2@4741,3292 4741,3262 4751.47,3251.53 U2.17@4751.47,3228.68 ; U2.25@4751.47,3175.69 4781,3146.16 U2.25@4771.16,3136.32 ; R7.1@4759,3007 4771.16,3019.16 U2.3@4771.16,3063.32 ; R13.1@4769,4918 4797.5,4918 4812,4932.5 4812,4998 4787.5,5022.5 ; U2.25@4810.53,3107.47 4810.53,3116.63 U2.8@4863.68,3116.63 ; U2.6@4830.21,3046.79 4840.21,3036.79 v2@4871,3036.79 ; R12.2@4849.53,2935 v2@4889,2935 ; U2.12@4863.68,3195.37 4863.68,3221.68 v2@4888,3246 ; v1(4885,5600) 4940,5685 ; v2@4887.44,3261.56 C8.2@4887.44,3305 C8.2@4887.44,3315 ; 4940.26,5685.47 ccw(c4000,4000) 4144.94,5924.55 ; 3620.63,5892.35 cw(c4000,4000) 4144.94,5924.55
  Top Layer w25: v2@2888,4635 R28.2@2888,4686.47 ; v2@3058,4638 R29.2@3058,4686.47 ; v2@3061,4635 3131.94,4635 3191.94,4695 3340,4695 3365,4670 v2(3700,4670) 4480,4670 v2(4535,4725) v1(4660,4725) ; J1.26@4301,5196 4301,4976 4342,4935 v2(4445,4935) 4580,5070 J4.1@4690,5070 ; C4.1@4469,3346.06 4469,3419 v2(4560,3510) ; J3.2@4665,5220 4665,5145 4690,5120 J4.1@4690,5070 ; J4.1@4690,5065 J4.1@4690,5070 ; v2@5175,3033 C9.1@5175,3082.44
  Bottom Layer w10: J2.9@2760,2855 J2.9@2765,2855 ; J2.8@2762.16,2716.42 2762.16,2852.16 J2.9@2765,2855 ; v1(2920,5475) U6.4@2959.87,5501.69 ; SW1.2@3015,3205 3015,3125 2945,3055 2895,3055 2765,2925 J2.9@2765,2855 ; v1(3160,5620) U7.4@3201.84,5642.09 ; v1(3400,5725) U8.4@3442.59,5740.4 ; v2@3486.5,3500.5 3466.9,3480.9 3466.9,3191.9 3315,3040 3285,3040 3255,3010 3255,2990 3120,2855 J2.9@2765,2855 ; v1(3645,5790) U9.4@3685.55,5798.92 ; v2(3700,4670) 3700,4539.52 3710.4,4529.12 3710.4,4329.6 v2(3755,4285) 3790.5,4249.5 3790.5,4229.5 3827,4193 v2@3827,4103 ; v2@3825.75,4099.25 3826.5,4100 v1@3930,4100 ; v2(3855,3385) 3864,3376 v2@4052.5,3376 ; v1(3885,5820) U10.4@3929.13,5824.57 ; v1@3935,4095 3935,3865 3935.04,3865.04 U15.1@3935.04,3780 ; v2(3975,5400) 3975,5453.9 4033,5511.9 4268.58,5511.9 4326.9,5453.58 4326.9,5353 4300,5326.1 v2(4300,5290) ; v1(4104,4269) 4160,4213 4160,4160 4175,4145 4175,4102 v2@4174,4101 ; v1(4130,5820) U11.4@4174.46,5816.09 ; 4162,4213 4298,4213 v2(4315,4230) ; v1(4380,5785) U12.4@4421.87,5776.83 ; v1(4415,5460) 4415,5365 v1(4455,5325) 4665,5325 ; v1(4630,5715) U13.4@4670.77,5699.22 ; J3.2@4665,5220 4665,5325 ; v1(4690,5365) 4665,5340 4665,5325 ; v1(4885,5600) U14.4@4921.27,5578.88
  Bottom Layer w25: v2(2889,4634) v2@3060,4634 ; v2(4445,4935) 4445,4900 4535,4810 v2(4535,4725) ; v2(4560,3510) 4920,3870 4920,4605 4800,4725 v1(4660,4725)
  other v2: 4895,2935.5 4741.5,2947 4487.5,2999.5 5175.5,3031 4871,3036 4888,3262 4693.5,3281.5 4430,3347 4274.5,3363.5 4063,3376.5 3827.5,4101 4175,4101 3060,4635
  other v3: 3918.76,3467.76 3966,3467.76 4013.24,3467.76 3918.76,3515 3966,3515 4013.24,3515 3918.76,3562.24 3966,3562.24 4013.24,3562.24
  other v4: 4757.38,3122.38 4804.62,3122.38 4757.38,3169.62 4804.62,3169.62 2951.38,4863.38 2998.62,4863.38 2951.38,4910.62 2998.62,4910.62
I2C_SCL: J1.22 R4.1 U1.11 U16.4 | length 2958.3
  Top Layer w8: U1.11@3995.53,3613.43 3995.53,3660.53 4020,3685 v1(4070,3685) ; J1.22@4200,5197.02 v2@4200,5291 ; R4.1@4200,5334 4200,5306.28 v2@4211.28,5295 ; v1(4270,5445) 4270,5425 4330,5365 4395,5365 4395.31,5365.31 U16.4@4508.9,5365.31
  Bottom Layer w8: v1@4070,3690 v1(4070,3685) 4105,3650 4227.51,3650 4243.41,3665.9 4475.96,3665.9 4504.1,3694.04 4504.1,4553.39 4282.49,4775 4228.42,4775 4210,4793.42 4210,5075 4200,5085 v2@4200,5290 ; v2(4201,5294) 4201,5346 4270,5415 v1(4270,5445)
I2C_SDA: J1.20 R3.1 U1.10 U16.6 | length 3053.7
  Top Layer w8: U1.10@4015.21,3613.43 4015.21,3632.7 4033.41,3650.9 4090.9,3650.9 v1@4115,3675 ; J1.20@4149,5196.02 v2@4149,5294 ; v2@4150,5296 R3.1@4150,5330 ; v1@4200,5445 v1(4200,5435) 4235,5435 4385,5285 4530,5285 4545.31,5300.31 U16.6@4545.31,5328.9
  Bottom Layer w8: v1(4125,3685) 4237.05,3685 4240.25,3681.8 4469.37,3681.8 4488.2,3700.63 4488.2,4546.8 4275.9,4759.1 4221.84,4759.1 4190,4790.94 4190,5066 4149,5107 v2@4149,5287 ; v2(4151,5291) 4151,5426 4160,5435 4190,5435 4200,5445 v1(4200,5435)